# Altium PCB PCB.PcbDoc
Units mm, origin at the board's own origin, x right, y up, seen from the top; angles counter-clockwise.
Board outline 130.05 x 109.98 mm, 2 copper layers (Top Layer, Bottom Layer), stack 1.57 mm thick; 58 components, 41 nets, 197 pads, 319 vias.
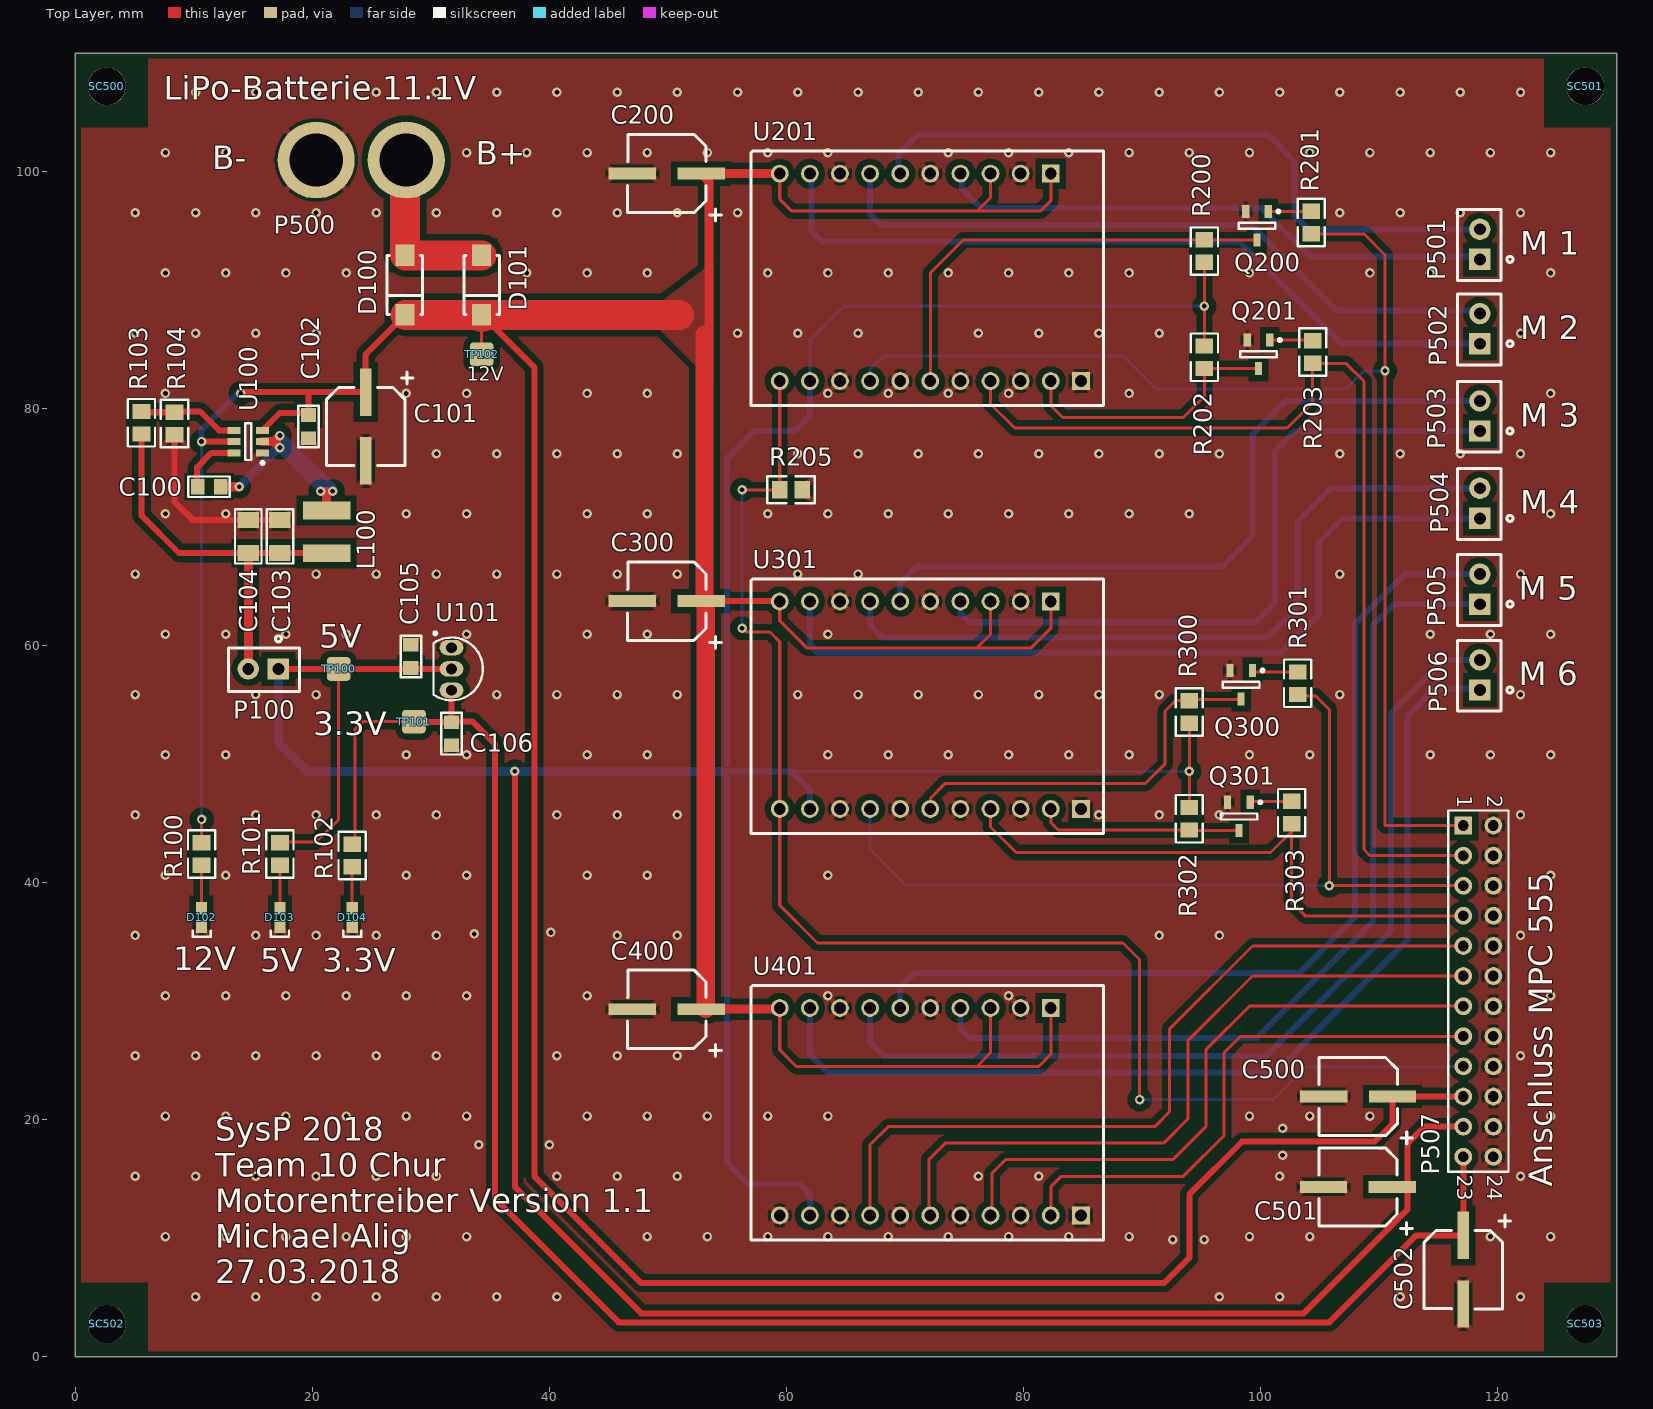
[diagram p0: Top Layer view]
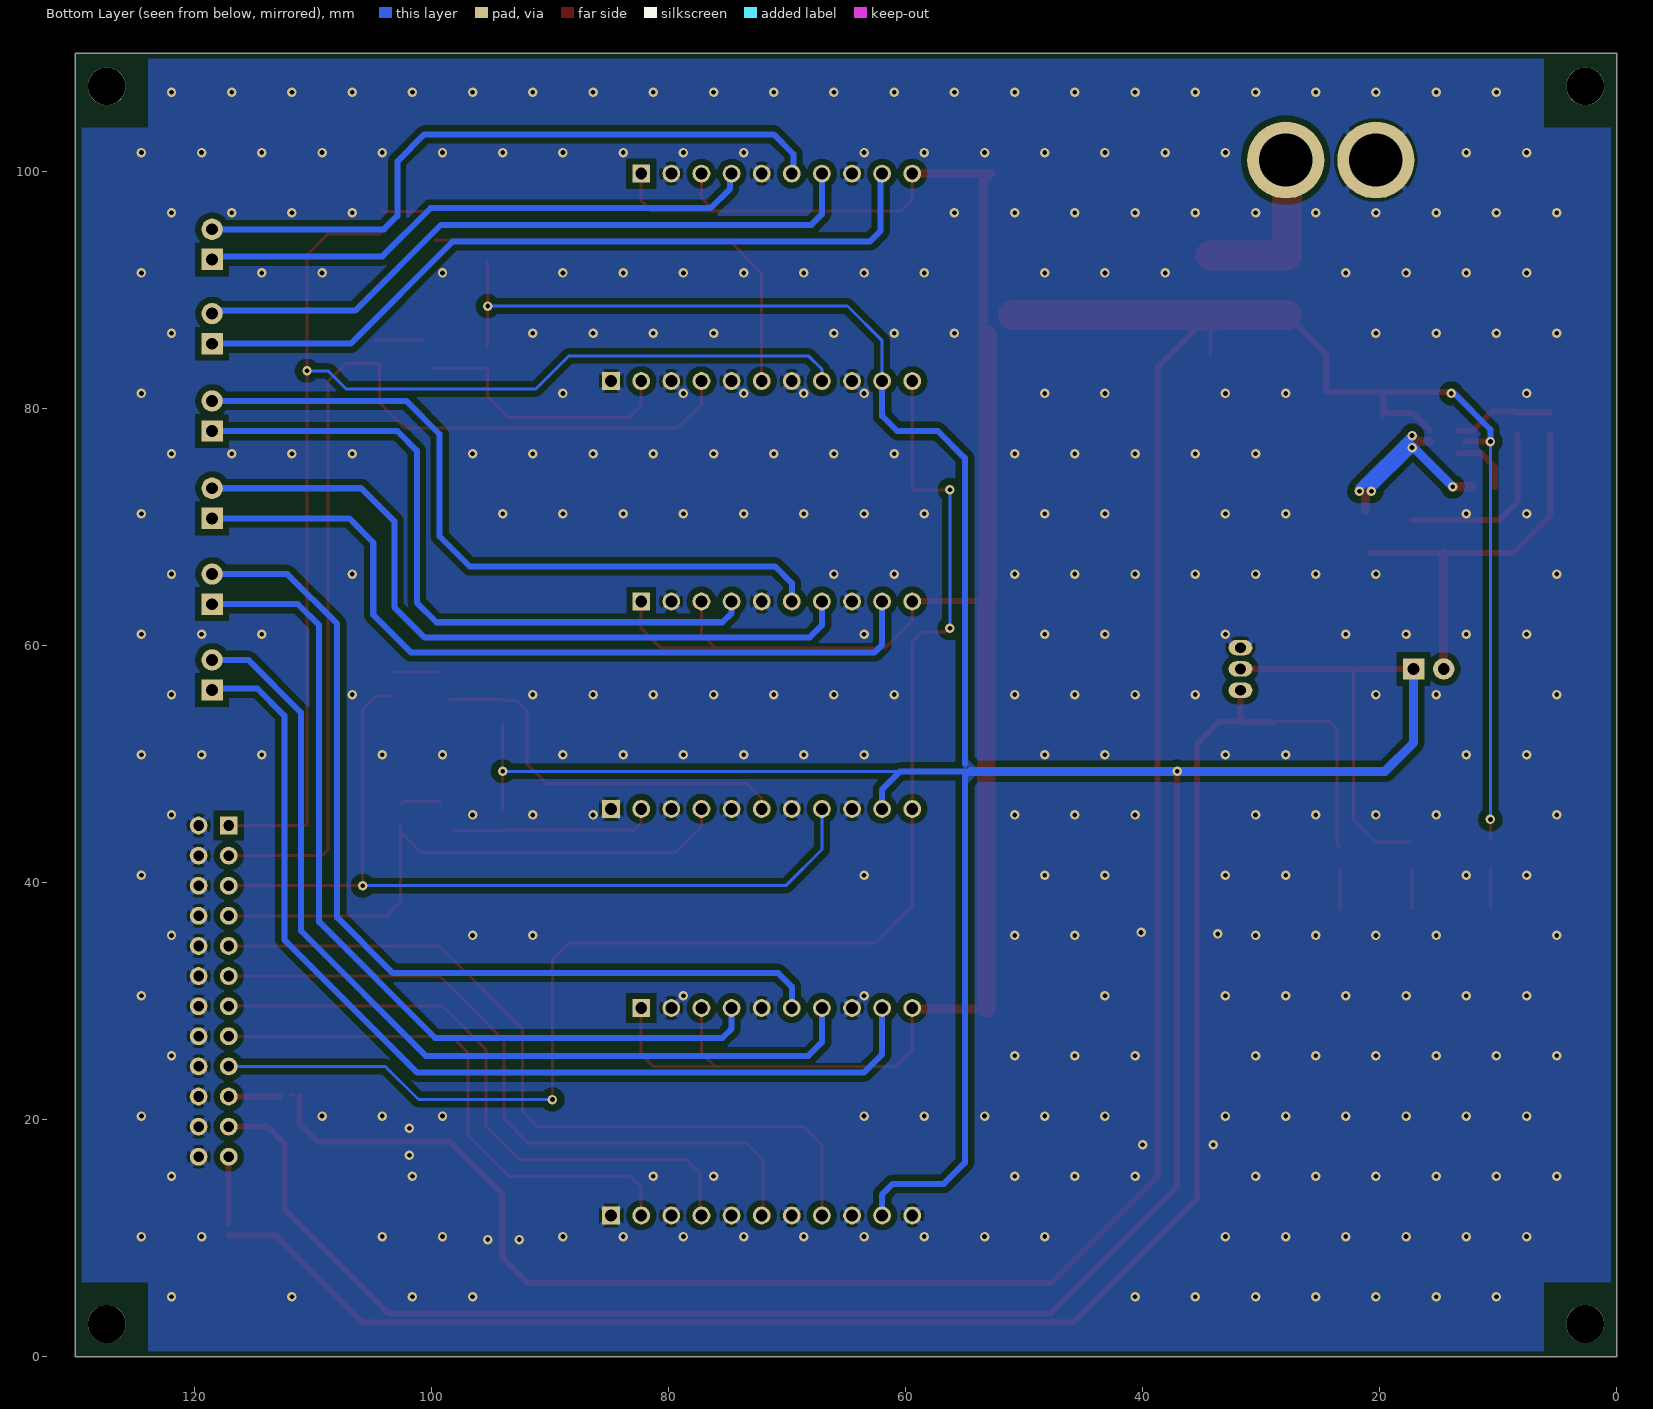
[diagram p1: Bottom Layer view, seen from below]
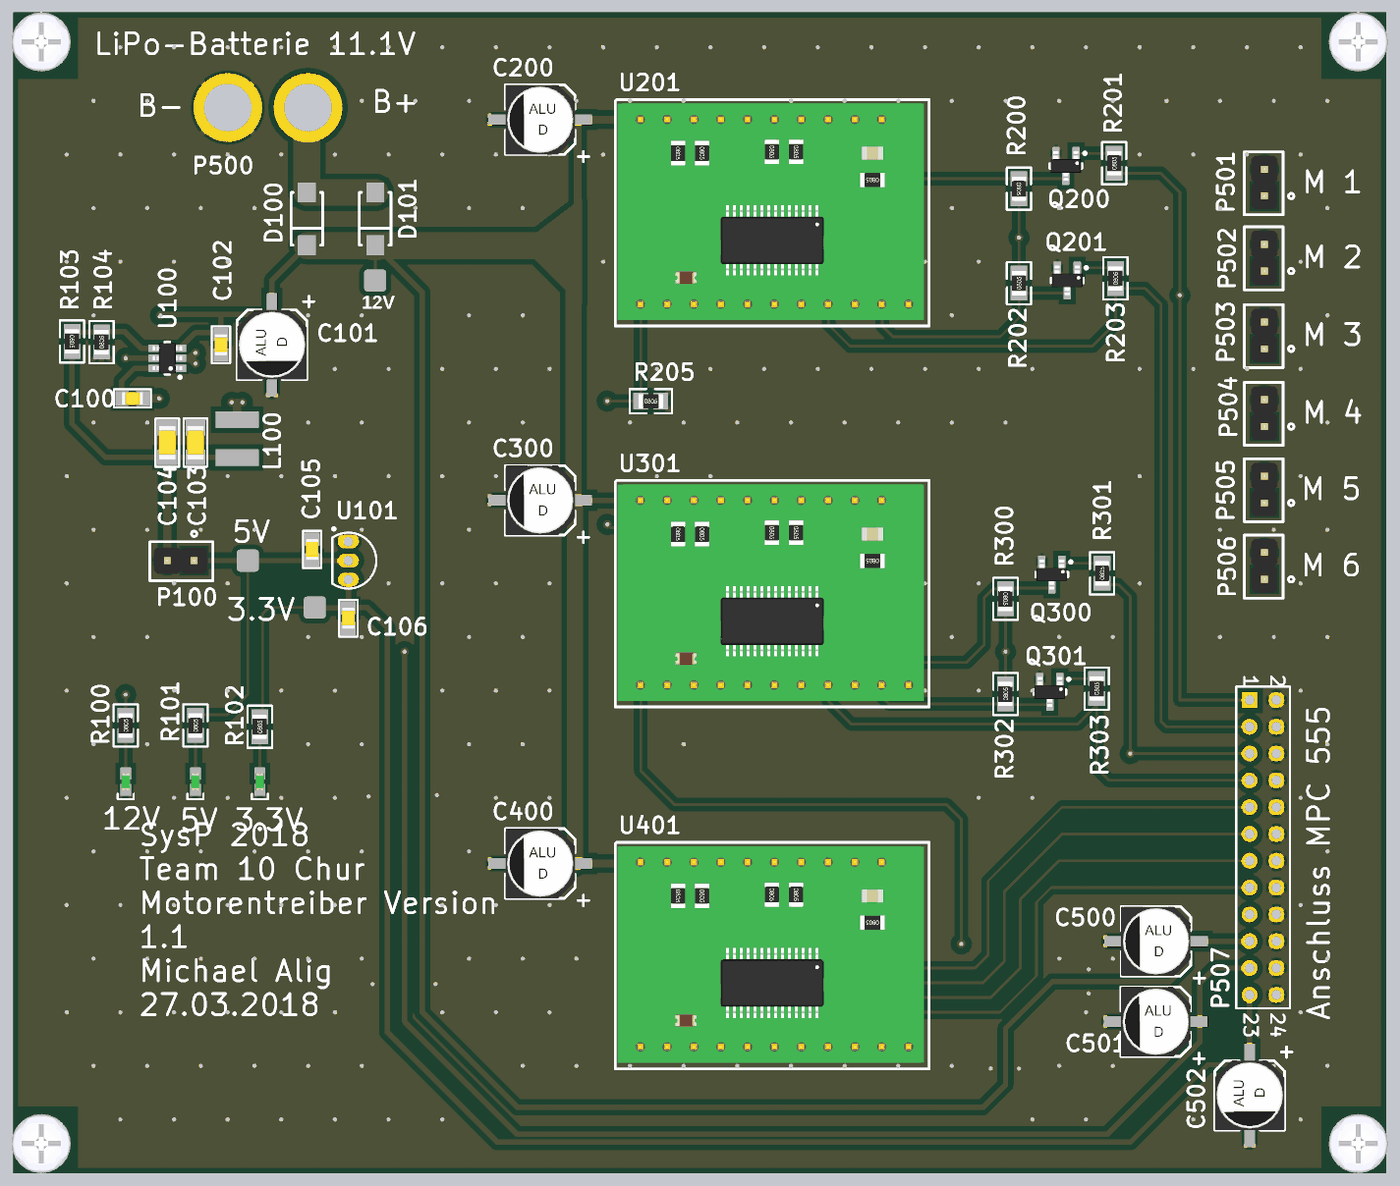
[diagram p2: 3D render of the assembled board from above, using the file's embedded part models]

## Layer stack, top to bottom
Top Solder: solder mask 0.0102, Solder Resist, Dk 3.5
Top Layer: signal copper 0.035
Dielectric1: core 1.5, FR-4, Dk 4.2
Bottom Layer: signal copper 0.035
Bottom Solder: solder mask 0.0102, Solder Resist, Dk 3.5

## Board outline
0,0 0,109.982 130.048,109.982 130.048,0

## Design rules (kind name [scope] priority, off if disabled: settings)
Clearance Polygon [InPolygon] p1: gap=0.508 ignorepadtopadclearanceinfootprint=FALSE except(0: Arc-Hole Track-Hole SMDPad-Hole THPad-Hole Via-Hole Fill-Hole Poly-Hole Region-Hole Text-Hole) // Polygon Clearance
Clearance [All] p2: gap=0.254 ignorepadtopadclearanceinfootprint=FALSE except(0: Arc-Hole Track-Hole SMDPad-Hole THPad-Hole Via-Hole Fill-Hole Poly-Hole Region-Hole Text-Hole)
FabricationTestPointUsage TestPointUsage [All] p1 off: valid=0 allowmultiple=FALSE
FabricationTestpoint Testpoint [All] p1 off: side=3 testpointundercomponent=TRUE minsize=1.016 maxsize=2.54 preferedsize=1.524 minholesize=0 maxholesize=1.016 preferedholesize=0.813 testpointgrid=0.025 allowsidetop=TRUE allowsidebottom=TRUE usegrid=TRUE gridtolerance=0
FanoutControl Fanout_BGA [IsBGA] p1 off: bgadir=Out bgaviamode=Centered fanoutstyle=Auto fanoutdirection=Alternating viagrid=0.025 // Fanout_BGA (Default Rule)
FanoutControl Fanout_LCC [IsLCC] p2 off: bgadir=Out bgaviamode=Centered fanoutstyle=Auto fanoutdirection=Alternating viagrid=0.025 // Fanout_LCC (Default Rule)
FanoutControl Fanout_SOIC [IsSOIC] p3 off: bgadir=Out bgaviamode=Centered fanoutstyle=Auto fanoutdirection=Alternating viagrid=0.025 // Fanout_SOIC (Default Rule)
FanoutControl Fanout_Small [(CompPinCount < 5)] p4 off: bgadir=Out bgaviamode=Centered fanoutstyle=Auto fanoutdirection=OutThenIn viagrid=0.025 // Fanout_Small (Default Rule)
FanoutControl Fanout_Default [All] p5 off: bgadir=Out bgaviamode=Centered fanoutstyle=Auto fanoutdirection=Alternating viagrid=0.025 // Fanout_Default (Default Rule)
Height [All] p1 off: minheight=0 maxheight=25.4 prefheight=12.7
HoleSize HoleType [IsPad And HasSquareHole] p1: absolutevalues=TRUE maxlimit=0 minlimit=0 maxpercent=80.000 minpercent=20.000 // Find Square Holes
HoleSize [All] p2: absolutevalues=TRUE maxlimit=5 minlimit=0.4 maxpercent=80.000 minpercent=20.000
LayerPairs [All] p1 off: enforce=TRUE
MinimumAnnularRing "Minimum Annular Ring" [All] p1: minimumring=0.2
PasteMaskExpansion [All] p1: expansion=0.05
PolygonConnect PolygonConnectVia [IsVia] p1: connectstyle=Direct reliefconductorwidth=0.254 reliefentries=4 polygonreliefangle="90 Angle" airgapwidth=0.254 // Direct Connect Via
PolygonConnect [All] p2: connectstyle=Relief reliefconductorwidth=0.508 reliefentries=4 polygonreliefangle="45 Angle" airgapwidth=0.254
RoutingCorners [All] p1 off: cornerstyle=45-Degree minsetback=2.54 maxsetback=2.54
RoutingLayers [All] p1 off: top layer_v5=TRUE bottom layer_v5=TRUE
RoutingPriority [All] p1 off: routingpriority=0
RoutingTopology [All] p1 off: topology=Shortest
RoutingVias [All] p1: holewidth=0.4 width=0.8 viastyle="Through Hole" minholewidth=0.3 minwidth=0.7 maxholewidth=2 maxwidth=3.4
SignalStimulus "#Version Information" [All] p1 off: kind=1 level=0 starttime=10.00n stoptime=60.00n periodtime=100.00n // Version 0-9 from 2010-11-01
SilkToSolderMaskClearance SilkscreenOverComponentPads [IsPad] p1: minsilkscreentomaskgap=0.254 clearancetoexposedcopper=TRUE
SolderMaskExpansion [All] p1: expansion=0.05
Width [All] p1: maxlimit=2.54 minlimit=0.254 preferedwidth=0.254 minimp=50.000000 maximp=50.000000 favimp=50.000000
14 further rules are at their usual default settings.

## Classes and differential pairs
component class Uebersicht: C500 C501 C502 P500 P501 P502 P503 P504 P505 P506 P507 P508 P509 P510 P511 SC500 SC501 SC502 SC503
component class "Spannungsversorgung: 12V, 5V, 3.3V": C100 C101 C102 C103 C104 C105 C106 C205 C206 D100 D101 D102 D103 D104 F100 L100 P100 R100 R101 R102 R103 R104 TP100 TP101 TP102 U100 U101
component class "Motor3: Hubmechanismus    Motor3: Ausfahrmechanismus": C300 Q300 Q301 R300 R301 R302 R303 U301
component class "Motor1: Fortbewegung    Motor2: Reserve": C200 Q200 Q201 R200 R201 R202 R203 R205 U201
component class "Motor5: Vibbration    Motor6: Drehmechanismus": C400 U401

## Components (designator, comment, footprint, x,y, rotation, side; value= is the part's Value field where it differs from the comment)
C100 "100nF" CAPC0805 11.303,73.406 r0 top value=100n
C101 "AVE476M16D16T-F" "CDE_CAP AVE CODE D_H" 24.511,78.486 r180 top value=10uF
C102 "100nF" CAPC0805 19.685,78.486 r270 top value=100n
C103 "22uF" CAPC1206 17.272,69.215 r270 top value=22u
C104 "22uF" CAPC1206 14.605,69.215 r90 top value=22u
C105 "1uF" CAPC0805 28.321,59.096 r90 top value=100n
C106 "1uF" CAPC0805 31.75,52.578 r270 top value=100n
C200 "AVE476M16D16T-F" "CDE_CAP AVE CODE D_H" 49.911,99.822 r90 top value=10uF
C300 "AVE476M16D16T-F" "CDE_CAP AVE CODE D_H" 49.911,63.754 r90 top value=10uF
C400 "AVE476M16D16T-F" "CDE_CAP AVE CODE D_H" 49.911,29.337 r90 top value=10uF
C500 "AVE476M16D16T-F" "CDE_CAP AVE CODE D_H" 108.225,21.971 r90 top value=10uF
C501 "AVE476M16D16T-F" "CDE_CAP AVE CODE D_H" 108.204,14.351 r90 top value=10uF
C502 "AVE476M16D16T-F" "CDE_CAP AVE CODE D_H" 117.094,7.366 r180 top value=10uF
D100 "SK34SMA" DIOTEC_DO-214AC_1K2A_2_H 27.813,90.424 r270 top
D101 "SK34SMA" DIOTEC_DO-214AC_1K2A_2_H 34.29,90.424 r270 top
D102 "LTST-C190GKT" "LED 0603 green" 10.668,37.084 r90 top
D103 "LTST-C190GKT" "LED 0603 green" 17.272,37.084 r90 top
D104 "LTST-C190GKT" "LED 0603 green" 23.368,37.084 r90 top
L100 "NRS5020T4R7MMGJ" NRS5024T4R7MMGJV 21.209,69.596 r270 top
P100 "Stiftleiste 2 Pol" "2Pin Header 2.54mm" 17.145,58.039 r180 top
P500 "Stecker XT-60" "Batteriestecker XT-60" 24.13,100.965 r0 top
P501 "Stiftleiste 2 Pol" "2Pin Header 2.54mm" 118.491,92.583 r90 top
P502 "Stiftleiste 2 Pol" "2Pin Header 2.54mm" 118.491,85.471 r90 top
P503 "Stiftleiste 2 Pol" "2Pin Header 2.54mm" 118.491,78.105 r90 top
P504 "Stiftleiste 2 Pol" "2Pin Header 2.54mm" 118.491,70.739 r90 top
P505 "Stiftleiste 2 Pol" "2Pin Header 2.54mm" 118.491,63.5 r90 top
P506 "Stiftleiste 2 Pol" "2Pin Header 2.54mm" 118.491,56.261 r90 top
P507 "Stiftleiste 24Pol (12X2)" HDR2X12 117.094,44.831 r270 top
Q200 "Si2302CDS" SOT23-3 99.695,95.434 r270 top
Q201 "Si2302CDS" SOT23-3 99.822,84.582 r270 top
Q300 "Si2302CDS" SOT23-3 98.359,56.712 r270 top
Q301 "Si2302CDS" SOT23-3 98.171,45.593 r270 top
R100 "Generic" GEN_R0805_H 10.668,42.418 r90 top value=18k
R101 "Generic" GEN_R0805_H 17.272,42.418 r90 top value=5.6k
R102 "Generic" GEN_R0805_H 23.368,42.291 r90 top value=4.7k
R103 "Generic" GEN_R0805_H 5.588,78.806 r270 top value=56k
R104 "Generic" GEN_R0805_H 8.382,78.74 r90 top value=10k
R200 "Generic" GEN_R0805_H 95.25,93.279 r270 top value=1k
R201 "Generic" GEN_R0805_H 104.267,95.692 r90 top value=10
R202 "Generic" GEN_R0805_H 95.25,84.328 r90 top value=1k
R203 "Generic" GEN_R0805_H 104.394,84.77 r90 top value=10
R205 "Generic" GEN_R0805_H 60.391,73.152 r0 top value=10k
R300 "Generic" GEN_R0805_H 93.98,54.417 r270 top value=1k
R301 "Generic" GEN_R0805_H 103.124,56.83 r90 top value=10
R302 "Generic" GEN_R0805_H 93.98,45.4 r90 top value=1k
R303 "Generic" GEN_R0805_H 102.616,45.913 r90 top value=10
SC500 "Screw M3x10mm with Distancebolt 15mm" Screw_M3x10_Dist_15mm 2.667,107.188 r0 top
SC501 "Screw M3x10mm with Distancebolt 15mm" Screw_M3x10_Dist_15mm 127.381,107.188 r0 top
SC502 "Screw M3x10mm with Distancebolt 15mm" Screw_M3x10_Dist_15mm 2.667,2.794 r0 top
SC503 "Screw M3x10mm with Distancebolt 15mm" Screw_M3x10_Dist_15mm 127.381,2.794 r0 top
TP100 "Testpoint xSmall" TP_SMD_xsmall 22.225,58.039 r0 top
TP101 "Testpoint xSmall" TP_SMD_xsmall 28.575,53.594 r0 top
TP102 "Testpoint xSmall" TP_SMD_xsmall 34.29,84.582 r180 top
U100 "TPS562209" SOT23-6 14.605,77.216 r180 top
U101 "LP38691DT-3.3" TO-92-TO3 31.75,58.039 r180 top
U201 "DRV8841Board" DRV8841_Board 82.296,99.822 r270 top
U301 "DRV8841Board" DRV8841_Board 82.296,63.728 r270 top
U401 "DRV8841Board" DRV8841_Board 82.296,29.438 r270 top

## Footprints (in the part's own frame and the unit in brackets; to place one, negate y for a bottom-side part, rotate by r counter-clockwise, add the part's x,y. Pads: shape width x height; smd on the part's side, far side on the other; paste and mask are expansions set on the pad)
"2Pin Header 2.54mm" [mm]
  rect 1.8x1.8 hole 1: 1(0,0)
  round 1.8 hole 1: 2(2.54,0)
  silkscreen extent -1.78,-2.79 4.19,1.91, body extent -1.27,-1.24 3.81,1.25, height 8.54
"Batteriestecker XT-60" [mm] "XT-60"
  round 6.5 hole 4.5: 1(-3.8,0) 2(3.8,0)
  body extent -8,-4 8,4, height 16
CAPC0805 [mm]
  rect 1.149x1.3 smd: 1(-0.975,0) 2(0.975,0)
  silkscreen extent -1.75,-0.86 1.75,0.86, body extent -1,-0.6 1,0.6, height 1.2
CAPC1206 [mm]
  rect 1.35x1.8 smd: 1(-1.4,0) 2(1.4,0)
  silkscreen extent -2.29,-1.12 2.29,1.12, body extent -1.6,-0.8 1.6,0.8, height 1.8
"CDE_CAP AVE CODE D_H" [mm]
  rect 1x4 smd paste-0.002 mask+0.07: 1(0,-2.9) 2(0,2.9)
  silkscreen extent -4,-4.6 3.29,3.3, body extent -3.31,-3.5 3.29,3.5
DIOTEC_DO-214AC_1K2A_2_H [mm]
  rect 1.8x1.6 smd: 1(2.5,0) 2(-2.5,0)
  silkscreen extent -2.5,-1.5 2.5,1.5
DRV8841_Board [mm]
  rect 1.5x1.5 hole 1: 11(0,0) 21(17.5,2.54)
  round 1.5 hole 1: 12(0,-2.54) 13(0,-5.08) 14(0,-7.62) 15(0,-10.16) 16(0,-12.7) 17(0,-15.24) 18(0,-17.78) 19(0,-20.32) 22(17.5,0) 23(17.5,-2.54) 24(17.5,-5.08) 25(17.5,-7.62) 26(17.5,-10.16) 27(17.5,-12.7) 28(17.5,-15.24) 29(17.5,-17.78) 110(0,-22.86) 210(17.5,-20.32) 211(17.5,-22.86)
  silkscreen extent -1.91,-25.27 19.56,4.45, body extent -1.52,-25.04 18.98,3.96, height 7.94
GEN_R0805_H [mm]
  rect 1.3x1.5 smd: 1(-0.95,0) 2(0.95,0)
  silkscreen extent -2,-1.15 2,1.15, body extent -1.15,-0.67 1.15,0.68, height 0.76
HDR2X12 [mm] "Connector; Header; 12x2 Position"
  rect 1.5x1.5 hole 0.9: 1(0,0)
  round 1.5 hole 0.9: 2(0,2.54) 3(2.54,0) 4(2.54,2.54) 5(5.08,0) 6(5.08,2.54) 7(7.62,0) 8(7.62,2.54) 9(10.16,0) 10(10.16,2.54) 11(12.7,0) 12(12.7,2.54) 13(15.24,0) 14(15.24,2.54) 15(17.78,0) 16(17.78,2.54) 17(20.32,0) 18(20.32,2.54) 19(22.86,0) 20(22.86,2.54) 21(25.4,0) 22(25.4,2.54) 23(27.94,0) 24(27.94,2.54)
  silkscreen extent -1.27,-1.27 29.21,3.81
"LED 0603 green" [mm]
  rect 1.05x0.95 smd: 1(-0.775,0) 2(0.775,0)
  silkscreen extent -1.65,-0.76 -1.14,0.76, body extent -0.81,-0.4 0.81,0.4, height 0.6
NRS5024T4R7MMGJV [mm] "NRS5024T4R7MMGJV"
  rect 1.5x4 smd: 1(-1.8,0) 2(1.8,0)
  body extent -1.8,-2 1.8,2, height 2.4
Screw_M3x10_Dist_15mm [mm]
  round 3.2 hole 3.2: 0(0,0)
  Multi-Layer pour cut-out: -3.5,3.5 3.5,3.5 3.5,-3.5 -3.5,-3.5
  body extent -2.8,-2.89 2.8,2.89, height 2.38
SOT23-3 [mm]
  rect 1.1x0.6 smd: 1(-1.2,0.95) 2(-1.2,-0.95) 3(1.2,0)
  silkscreen extent -1.32,-1.55 0.25,1.93, body extent -1.4,-1.45 1.4,1.45, height 1.3
SOT23-6 [mm]
  rect 1.1x0.6 smd: 1(-1.2,0.95) 2(-1.2,0) 3(-1.2,-0.95) 4(1.2,-0.95) 5(1.2,0) 6(1.2,0.95)
  silkscreen extent -1.33,-1.55 0.25,1.92, body extent -1.4,-1.45 1.4,1.45, height 1.45
TO-92-TO3 [mm] "TO, Flat Index; 3 In-Line, Axial Leads; Body Dia. 4.8mm; Leads 0.56 x 0.53 mm (max)"
  oval 2x1.3 hole 0.9: 1(0,-1.8) 2(0,0) 3(0,1.8)
  silkscreen extent -2.65,-3.13 1.52,2.65, body extent -2.65,-2.66 1.52,2.66, height 5.33
TP_SMD_xsmall [mm]
  rrect30% 2x2 smd: 1(0,0)

## Part data
C100 C102 C105 C106: library part "C Bipolar 0805", "X7R MLCC 0805 (2012 Metric)", Case-EIA=0805, Case-Metric=2012, Rated Voltage=50V, Temperature Characteristics EIA=X7R, Temperature Range EIA=-55C/+125C, Tolerance=10%
C101 C200 C300 C400 C500 C501 C502: library part "CDE_AVE476M16D16T-F_AVE CODE D", "Aluminum Electrolytic Capacitors for Filtering and Bypass, 47uF, 16V", Distributor PartNr=598-AVE476M16D16T-F, Manufacturer="Cornell Dubilier", ValueAddon="16V ±20 %", #Class=PASSIVE, #ClassSub=CAPACITOR, ComponentLink1Description="Manufacturer Link", ComponentLink2Description=Datasheet, ComponentLink2URL=http://www.cde.com/catalogs/AVE.pdf, ComponentLink3Description="Packaging Specification", Distributor=Mouser, Manufacturer PartNr=AVE476M16D16T-F, Published=20121220, Publisher="Stefan Ursella, M.Eng", RefFootprint="CDE_CAP AVE CODE D", RefSchema="CDE_AVE476M16D16T-F_AVE CODE D"
C103 C104: library part "C Bipolar 1206", "X7R MLCC 1206 (3016 Metric)", Case-EIA=1206, Case-Metric=3216, Rated Voltage=10V, Temperature Characteristics EIA=X7R, Temperature Range EIA=-55C/+125C, Tolerance=10%
D100 D101: library part DIOTEC_SK34SMA_DO-214AC, Distributor PartNr=600727, Manufacturer="Diotec Semiconductor", #Class=DIODE, #ClassSub=SCHOTTKY, ComponentLink1Description="Manufacturer Link", ComponentLink1URL=http://diotec.com/en/products/all-products/productlist.html?aid=SK34SMA, ComponentLink2Description=Datasheet, ComponentLink2URL=http://diotec.com/tl_files/diotec/files/pdf/datasheets/sk32sma.pdf, ComponentLink3Description="Packaging Specification", ComponentLink3URL=http://diotec.com/en/products/all-products/productlist.html?aid=SK34SMA, Distributor=Distrelec, Manufacturer PartNr=SK34SMA, Published=20121217, Publisher="Stefan Ursella, M.Eng", RefFootprint=DIOTEC_DO-214AC_1K2A_2_H, RefSchema=DIOTEC_SK34SMA_DO-214AC, Status=nLager
D102 D103 D104: library part LED, "LED SMD 0603 green 6mcd", Color=green, Forward Current=30mA, Forward Voltage=2.1V, ComponentLink1Description="Datasheet LTST-C190GKT", ComponentLink1URL=V:\Diodes\Lite-On-LTST-C190GKT.pdf, Spectrum=565nm
L100: "Tayo Yuden NRS5020T4R7MMGJ 4u7 2A"
P100: library part "2 Pin Connector"
P500: library part "Batteriestecker XT-60"
P501 P502 P503 P504 P505 P506: library part "2 Pin Connector", "2 Pin Header 2.54mm"
P507: library part "Header 12X2", "Header, 12-Pin, Dual row", LatestRevisionDate=17-Jul-2002, LatestRevisionNote="Re-released for DXP Platform.", Publisher="Altium Limited"
Q200 Q201 Q300 Q301: library part "Depletion Mode MOSFET", "N-Channel 20V (D-S) MOSFET", ComponentLink1Description="Datasheet Si2302CDS", ComponentLink1URL=V:\MosFets\si2302cds.pdf, ID=2.9A, RDSON=57mR, VDSS=20V
R100 R101 R102 R103 R104 R200 R201 R202 R203 R205 R300 R301 R302 R303: library part GEN_R_2, "generic resistor", Distributor PartNr=tbd, Manufacturer=Tbd, #Class=PASSIVE, #ClassSub=RESISTOR, ComponentLink1Description="Manufacturer Link", ComponentLink2Description=Datasheet, ComponentLink3Description="Packaging Specification", Distributor=tbd, Manufacturer PartNr=tbd, Published=8-Jun-2000, Publisher="Altium Limited", RefFootprint=GEN_R0805_H, RefSchema=GEN_R_2
SC500 SC501 SC502 SC503: library part "Screw M3 10mm with Distancebolt 15mm"
TP100 TP101 TP102: library part "Testpoint small", Type="Standard (No BOM)"
U100: "3-A Synchronous Step-Down Voltage Regulator", Manufactor="Texas Instruments", ComponentLink1Description="Datasheet TPS56x209", ComponentLink1URL=V:\Power_Management_ICs\PWM_Cont\TPS56x209.pdf, Order Nr.=TPS562209DDCR
U101: library part MCP1700-1202E/TO, "Low Quiescent Current LDO, 3-Pin TO-92, Extended TemperatureBAG", Supplier Part Number 1=MCP1700-1202E/TO-ND, ComponentLink1Description=Datasheet, ComponentLink1URL=http://ww1.microchip.com/downloads/en/DeviceDoc/21826b.pdf, ComponentLink2Description="Packaging Specification", ComponentLink2URL=http://www.microchip.com/stellent/groups/techpub_sg/documents/packagingspec/en012702.pdf, ComponentLink3Description="Microchip.com Home", ComponentLink3URL=http://www.microchip.com/, DatasheetVersion="revB, Feb-2007", PackageDescription="3-Lead Plastic Transistor Outline (TO) [TO-92]", PackageReference=TO-92-TO3, PackageVersion="revBB, Aug-2009", Published=29-Jan-2009, Publisher="Altium Limited", Supplier 1=Digi-Key
U201 U301 U401: library part DRV8841_Board

## Via types
v1: diameter 0.8, hole 0.4, Top Layer to Bottom Layer, tented both sides, 319 vias

## Nets (pads, with @x,y where several pads share a name; then routed paths per layer and width w, separated by ;. In a path a pad name is that pad's centre, name@x,y a point inside that pad or via, vN(x,y) a via of type N, cw(c..) or ccw(c..) an arc to the next point about the centre after c; other vN are vias at no path point)
3.3V: C106.1 C502.1 P507.23 R102.2 TP101.1 U101.3 | length 158.6
  Top Layer w0.254: R102.2@23.368,43.053 23.411,43.063 23.622,43.114 23.622,52.959 24.257,53.594 TP101.1 28.829,53.594 TP101.1@28.87,53.553
  Top Layer w0.508: TP101.1@28.87,53.553 C106.1 ; U101.3 31.75,53.594 33.528,53.594 35.433,51.689 35.433,13.335 45.847,2.921 105.791,2.921 113.136,10.266 C502.1 ; C502.1@117.094,11.303 P507.23
5V: C105.1 C501.1 P100.1 P507.21 R101.2 R200.2 R202.2 R300.2 R302.2 TP100.1 U101.2 U201.210 U301.210 U401.210 | length 380.7
  Top Layer w0.254: R101.2@17.399,43.434 20.32,43.434 22.225,45.339 TP100.1 ; C105.1@28.321,58.166 C105.1@28.448,58.039 ; R302.2@93.98,46.228 R302.2 v1(93.98,49.403) R300.2 ; R202.2@95.25,85.217 R202.2 v1(95.25,88.646) R200.2
  Top Layer w0.508: P100.1 TP100.1@21.971,58.039 ; TP100.1 28.448,58.039 U101.2@31.242,58.039 ; v1(37.084,49.403) 37.084,14.351 47.752,3.683 103.632,3.683 112.395,12.446 112.395,18.034 113.792,19.431 P507.21
  Bottom Layer w0.254: 60.452,49.403 v1(93.98,49.403) ; U201.210 61.976,85.725 64.897,88.646 v1@95.123,88.646
  Bottom Layer w0.508: 54.991,50.038 54.991,75.819 57.277,78.105 60.706,78.105 61.976,79.375 U201.210@61.976,82.296 ; U401.210 61.976,13.716 61.087,14.605 56.769,14.605 54.991,16.383 54.991,49.403 60.452,49.403 61.976,47.879 U301.210@61.976,46.609
  Bottom Layer w0.762: P100.1 17.145,51.816 19.558,49.403 v1(37.084,49.403) 54.483,49.403
12V: C101.1 C102.1 C200.1 C300.1 C400.1 C500.1 D100.1 D101.1 P507.19 R100.2 TP102.1 U100.3 U100.5 U201.11 U201.13 U201.110 U301.11 U301.13 U301.110 U401.11 U401.13 U401.110 | length 449.3
  Top Layer w0.254: R100.2@10.668,43.688 v1(10.668,45.339) ; D100.1@27.833,87.904 D100.1@27.94,88.011 ; TP102.1 D101.1@34.29,87.376 ; D101.1 D101.1@34.33,87.884 ; C400.1 53.192,29.337 C400.1@53.213,29.337 ; 53.192,63.246 C300.1@53.192,63.754 ; U401.110 U401.110@59.436,29.337 ; U301.110 59.436,62.103 61.722,59.817 76.073,59.817 ; U201.110 59.436,97.663 60.452,96.647 76.073,96.647 ; U401.110@59.563,29.464 U401.110@59.436,29.337 ; U401.13 77.216,25.654 76.073,24.511 ; U301.13@77.216,63.627 77.216,60.96 76.073,59.817 ; U201.13@77.216,99.568 77.216,97.79 76.073,96.647 ; U401.11@82.296,29.464 U401.11 82.296,25.527 81.28,24.511 76.073,24.511 ; U301.11 82.296,61.468 80.645,59.817 76.073,59.817 ; U201.11@82.296,99.695 82.296,97.536 81.407,96.647 76.073,96.647 ; C500.1@111.506,22.098 C500.1@111.887,22.098 ; C500.1@112.649,22.098 C500.1@112.776,21.971 ; U401.110@59.436,29.337 59.436,25.908 60.833,24.511 76.073,24.511
  Top Layer w0.508: v1@10.922,77.216 12.77,77.216 ; v1@13.991,81.386 C101.1 24.511,84.582 D100.1@27.833,87.904 ; U100.3 17.268,79.629 C102.1@19.685,79.629 ; C102.1 C102.1@19.685,79.629 ; 19.685,81.28 C102.1@19.685,79.629 ; D101.1@34.457,87.757 38.735,83.479 38.735,15.24 47.752,6.223 91.821,6.223 93.98,8.382 93.98,13.716 98.425,18.161 109.601,18.161 111.125,19.685 C500.1 ; C300.1@53.192,63.754 U301.110@59.436,63.754 ; C500.1@112.776,21.971 P507.19
  Top Layer w0.762: D100.1@27.833,87.904 D100.1@27.853,87.884 ; C200.1 53.467,99.166 53.467,86.614 53.086,86.233 ; C300.1@53.086,63.86 C300.1@53.192,63.754 ; C200.1@53.192,99.822 U201.110 ; C400.1@53.213,29.337 U401.110@59.436,29.337
  Top Layer w1.524: C300.1@53.086,63.86 53.086,86.233 ; C400.1@53.192,29.337 53.192,63.246
  Top Layer w2.54: D100.1@27.853,87.884 D101.1@34.163,87.884 ; D101.1@34.163,87.757 D101.1@34.457,87.757 ; D101.1@34.33,87.884 50.927,87.884
  Bottom Layer w0.254: v1(10.668,45.339) v1@10.668,77.089 ; v1@10.668,77.343 v1@10.922,77.089 ; v1@13.716,81.28 v1(13.97,81.28) ; U401.13 U401.13@77.216,29.464
  Bottom Layer w0.508: v1@10.668,77.343 10.668,78.232 v1@13.716,81.28
  other v1: 10.668,77.216
GND: C101.2 C102.2 C103.1 C104.2 C105.2 C106.2 C200.2 C300.2 C400.2 C500.2 C501.2 C502.2 D102.1 D103.1 D104.1 P500.1 P507.2 P507.4 P507.6 P507.8 P507.10 P507.12 P507.14 P507.16 P507.18 P507.20 P507.22 P507.24 Q200.2 Q201.2 Q300.2 Q301.2 R104.1 R205.2 U100.1 U101.1 U201.12 U201.15 U201.18 U201.21 U201.23 U201.25 U201.27 U201.29 U301.12 U301.15 U301.18 U301.21 U301.23 U301.25 U301.27 U301.29 U401.12 U401.15 U401.18 U401.21 U401.23 U401.25 U401.27 U401.29 U401.211 | length 15.2
  Top Layer w0.254: C103.1@17.269,70.615 C103.1@17.272,70.612
  Top Layer w0.508: R104.1 8.382,72.136 9.906,70.612 C104.2@14.605,70.612 ; C104.2 C103.1@17.269,70.615
  other v1: 10.16,5.08 15.24,5.08 20.32,5.08 25.4,5.08 30.48,5.08 35.56,5.08 40.64,5.08 96.52,5.08 101.6,5.08 111.76,5.08 121.92,5.08 92.583,9.906 95.25,9.906 7.62,10.16 12.7,10.16 17.78,10.16 22.86,10.16 27.94,10.16 33.02,10.16 48.26,10.16 53.34,10.16 58.42,10.16 63.5,10.16 68.58,10.16 73.66,10.16 78.74,10.16 83.82,10.16 88.9,10.16 99.06,10.16 104.14,10.16 119.38,10.16 124.46,10.16 5.08,15.24 10.16,15.24 15.24,15.24 20.32,15.24 25.4,15.24 30.48,15.24 40.64,15.24 45.72,15.24 50.8,15.24 76.2,15.24 81.28,15.24 101.6,15.24 121.92,15.24 101.854,17.018 34.036,17.907 40.005,17.907 101.854,19.304 7.62,20.32 12.7,20.32 17.78,20.32 22.86,20.32 27.94,20.32 33.02,20.32 43.18,20.32 48.26,20.32 53.34,20.32 58.42,20.32 63.5,20.32 99.06,20.32 104.14,20.32 109.22,20.32 124.46,20.32 5.08,25.4 10.16,25.4 15.24,25.4 20.32,25.4 25.4,25.4 30.48,25.4 40.64,25.4 45.72,25.4 50.8,25.4 121.92,25.4 7.62,30.48 12.7,30.48 17.78,30.48 22.86,30.48 27.94,30.48 33.02,30.48 43.18,30.48 63.5,30.48 78.74,30.48 124.46,30.48 5.08,35.56 15.24,35.56 20.32,35.56 25.4,35.56 30.48,35.56 45.72,35.56 50.8,35.56 91.44,35.56 96.52,35.56 121.92,35.56 33.655,35.687 40.132,35.814 7.62,40.64 12.7,40.64 27.94,40.64 33.02,40.64 43.18,40.64 48.26,40.64 63.5,40.64 124.46,40.64 5.08,45.72 15.24,45.72 20.32,45.72 25.4,45.72 30.48,45.72 40.64,45.72 45.72,45.72 50.8,45.72 86.36,45.72 91.44,45.72 96.52,45.72 121.92,45.72 7.62,50.8 12.7,50.8 27.94,50.8 33.02,50.8 43.18,50.8 48.26,50.8 63.5,50.8 68.58,50.8 73.66,50.8 78.74,50.8 83.82,50.8 88.9,50.8 99.06,50.8 104.14,50.8 114.3,50.8 119.38,50.8 124.46,50.8 5.08,55.88 15.24,55.88 20.32,55.88 35.56,55.88 40.64,55.88 45.72,55.88 50.8,55.88 60.96,55.88 66.04,55.88 71.12,55.88 76.2,55.88 81.28,55.88 86.36,55.88 91.44,55.88 106.68,55.88 121.92,55.88 7.62,60.96 12.7,60.96 17.78,60.96 22.86,60.96 33.02,60.96 43.18,60.96 48.26,60.96 63.5,60.96 114.3,60.96 119.38,60.96 124.46,60.96 5.08,66.04 20.32,66.04 25.4,66.04 30.48,66.04 35.56,66.04 40.64,66.04 45.72,66.04 50.8,66.04 60.96,66.04 66.04,66.04 106.68,66.04 121.92,66.04 7.62,71.12 12.7,71.12 27.94,71.12 33.02,71.12 43.18,71.12 48.26,71.12 58.42,71.12 63.5,71.12 68.58,71.12 73.66,71.12 78.74,71.12 83.82,71.12 88.9,71.12 93.98,71.12 124.46,71.12 30.48,76.2 35.56,76.2 40.64,76.2 45.72,76.2 50.8,76.2 60.96,76.2 66.04,76.2 71.12,76.2 76.2,76.2 81.28,76.2 86.36,76.2 91.44,76.2 96.52,76.2 106.68,76.2 111.76,76.2 116.84,76.2 121.92,76.2 7.62,81.28 27.94,81.28 33.02,81.28 43.18,81.28 48.26,81.28 63.5,81.28 68.58,81.28 73.66,81.28 78.74,81.28 88.9,81.28 124.46,81.28 5.08,86.36 10.16,86.36 15.24,86.36 20.32,86.36 55.88,86.36 60.96,86.36 66.04,86.36 76.2,86.36 81.28,86.36 86.36,86.36 91.44,86.36 121.92,86.36 7.62,91.44 12.7,91.44 17.78,91.44 22.86,91.44 38.1,91.44 43.18,91.44 48.26,91.44 58.42,91.44 63.5,91.44 68.58,91.44 73.66,91.44 78.74,91.44 83.82,91.44 88.9,91.44 99.06,91.44 109.22,91.44 114.3,91.44 124.46,91.44 5.08,96.52 10.16,96.52 15.24,96.52 20.32,96.52 25.4,96.52 30.48,96.52 35.56,96.52 40.64,96.52 45.72,96.52 50.8,96.52 55.88,96.52 106.68,96.52 111.76,96.52 116.84,96.52 121.92,96.52 7.62,101.6 12.7,101.6 33.02,101.6 38.1,101.6 43.18,101.6 48.26,101.6 53.34,101.6 58.42,101.6 63.5,101.6 73.66,101.6 78.74,101.6 83.82,101.6 88.9,101.6 93.98,101.6 99.06,101.6 104.14,101.6 109.22,101.6 114.3,101.6 119.38,101.6 124.46,101.6 10.16,106.68 15.24,106.68 20.32,106.68 25.4,106.68 30.48,106.68 35.56,106.68 40.64,106.68 45.72,106.68 50.8,106.68 55.88,106.68 60.96,106.68 66.04,106.68 71.12,106.68 76.2,106.68 81.28,106.68 86.36,106.68 91.44,106.68 96.52,106.68 101.6,106.68 106.68,106.68 111.76,106.68 116.84,106.68 121.92,106.68
NetC100_1: C100.1 U100.6 | length 5.3
  Top Layer w0.508: C100.1@10.287,73.406 10.287,75.057 11.496,76.266 U100.6
NetC100_2: C100.2 L100.1 U100.2 | length 21.4
  Top Layer w0.762: C100.2 v1(13.843,73.406) ; U100.2 16.764,77.216 ; v1@17.018,76.962 16.764,77.216 ; v1@17.018,77.47 16.764,77.216 ; L100.1 21.209,73.025
  Bottom Layer w0.254: v1(20.701,73.025) v1@20.701,73.279 ; v1(21.717,73.025) v1@21.717,73.279
  Bottom Layer w0.762: v1(13.843,73.406) v1@17.272,76.835 ; v1(17.272,76.708) v1@20.701,73.279 ; v1(17.272,77.724) v1@21.717,73.279
NetC103_2: C103.2 C104.1 L100.2 P100.2 R103.2 | length 32.6
  Top Layer w0.254: P100.2@14.478,58.42 P100.2@14.605,58.547 ; C103.2@17.269,67.815 C103.2@17.272,67.818 ; L100.2@20.825,67.815 L100.2@20.828,67.818
  Top Layer w0.508: R103.2 5.588,70.993 8.763,67.818 C104.1@14.351,67.818 ; C104.1 C103.2@17.269,67.815 ; C103.2 L100.2@20.825,67.815
  Top Layer w0.762: P100.2@14.605,58.547 C104.1
NetD100_2: D100.2 D101.2 P500.2 | length 15.2
  Top Layer w0.254: P500.2@27.686,101.6 P500.2@27.813,101.473 ; D100.2 27.813,92.964 D100.2@27.853,92.924
  Top Layer w2.54: D100.2@27.813,92.964 P500.2@27.813,101.473 ; D100.2@27.853,92.924 D101.2
NetD102_2: D102.2 R100.1 | length 3.4
  Top Layer w0.254: D102.2 R100.1@10.668,41.275
NetD103_2: D103.2 R101.1 | length 3.5
  Top Layer w0.254: D103.2@17.145,37.846 D103.2@17.272,37.973 ; D103.2 D103.2@17.272,37.973 ; R101.1@17.272,41.148 D103.2@17.272,37.973
NetD104_2: D104.2 R102.1 | length 3.4
  Top Layer w0.254: D104.2@23.368,37.732 D104.2 R102.1@23.368,41.148
NetP501_1: P501.1 U201.14 | length 47.4
  Bottom Layer w0.508: U201.14@74.803,99.822 74.803,98.552 76.454,96.901 100.076,96.901 104.14,92.837 118.237,92.837 P501.1
NetP501_2: P501.2 U201.16 | length 57.5
  Bottom Layer w0.254: 71.501,103.124 71.628,102.997
  Bottom Layer w0.508: U201.16@69.469,99.822 69.469,101.473 71.12,103.124 71.501,103.124 100.584,103.124 102.87,100.838 102.87,96.266 104.013,95.123 P501.2
NetP502_1: P502.1 U201.19 | length 65.3
  Bottom Layer w0.508: U201.19@62.103,99.949 62.103,94.996 62.992,94.107 98.171,94.107 106.807,85.471 P502.1
NetP502_2: P502.2 U201.17 | length 58.3
  Bottom Layer w0.508: U201.17 67.056,96.393 67.945,95.504 99.187,95.504 106.426,88.265 118.237,88.265 P502.2
NetP503_1: P503.1 U301.14 | length 59.3
  Bottom Layer w0.508: U301.14 74.676,62.738 75.438,61.976 99.568,61.976 101.219,63.627 101.219,76.454 102.87,78.105 P503.1
NetP503_2: P503.2 U301.16 | length 61.8
  Bottom Layer w0.508: U301.16@69.596,63.754 69.596,65.278 70.993,66.675 96.774,66.675 99.314,69.215 99.314,77.851 102.108,80.645 P503.2
NetP504_1: P504.1 U301.19 | length 68.7
  Bottom Layer w0.508: U301.19 61.976,60.071 62.611,59.436 101.727,59.436 104.902,62.611 104.902,68.707 106.934,70.739 P504.1
NetP504_2: P504.2 U301.17 | length 63.8
  Bottom Layer w0.254: U301.17@67.056,63.246 U301.17@67.691,63.881 ; U301.17 U301.17@67.056,63.754
  Bottom Layer w0.508: U301.17@67.056,63.246 67.056,61.722 68.072,60.706 100.584,60.706 103.124,63.246 103.124,70.485 105.918,73.279 P504.2
NetP505_1: P505.1 U401.14 | length 75.8
  Bottom Layer w0.254: U401.14 U401.14@74.676,29.591
  Bottom Layer w0.508: U401.14 74.676,27.686 75.438,26.924 99.695,26.924 109.474,36.703 109.474,61.722 111.252,63.5 P505.1
NetP505_2: P505.2 U401.16 | length 79.7
  Top Layer w0.254: U401.16@69.596,29.337 U401.16
  Bottom Layer w0.508: U401.16 69.596,31.242 70.739,32.385 103.251,32.385 107.95,37.084 107.95,61.849 112.141,66.04 P505.2
NetP506_1: P506.1 U401.19 | length 85.8
  Bottom Layer w0.508: U401.19 61.976,25.527 63.5,24.003 101.219,24.003 112.395,35.179 112.395,54.102 114.681,56.388 P506.1@118.745,56.388
NetP506_2: P506.2 U401.17 | length 79.4
  Bottom Layer w0.508: U401.17 67.056,26.543 68.199,25.4 100.457,25.4 110.998,35.941 110.998,54.356 115.443,58.801 P506.2
NetQ200_1: Q200.1 R201.2 | length 3.7
  Top Layer w0.254: Q200.1 104.127,96.634 R201.2@104.267,96.774
NetQ200_3: Q200.3 R200.1 U201.26 | length 37.8
  Top Layer w0.254: U201.26 72.136,91.44 74.93,94.234 R200.1@95.25,94.234 ; R200.1 99.69,94.229 Q200.3
NetQ201_1: Q201.1 R203.2 | length 4.1
  Top Layer w0.254: Q201.1@100.711,85.852 100.777,85.786 R203.2@104.775,85.786
NetQ201_3: Q201.3 R202.1 U201.22 | length 23
  Top Layer w0.254: U201.22 82.296,80.264 83.312,79.248 93.472,79.248 95.25,81.026 R202.1 ; R202.1@95.377,83.312 95.447,83.382 Q201.3
NetQ300_1: Q300.1 R301.2 | length 3.8
  Top Layer w0.254: Q300.1@99.314,57.785 99.319,57.78 R301.2
NetQ300_3: Q300.3 R300.1 U301.26 | length 33.1
  Top Layer w0.254: U301.26@72.136,46.482 72.136,47.117 73.406,48.387 90.297,48.387 91.948,50.038 91.948,54.483 92.832,55.367 R300.1 ; R300.1@93.783,55.442 Q300.3@98.425,55.442
NetQ301_1: Q301.1 R303.2 | length 3.6
  Top Layer w0.254: Q301.1@99.187,46.736 99.314,46.863 102.357,46.863 R303.2@102.616,46.604
NetQ301_3: Q301.3 R302.1 U301.22 | length 17.3
  Top Layer w0.254: U301.22 82.296,45.085 82.931,44.45 R302.1 ; R302.1@93.98,44.323 94.05,44.393 Q301.3
NetR103_1: R103.1 R104.2 U100.4 | length 8.4
  Top Layer w0.254: R103.1 R103.1@5.654,79.69
  Top Layer w0.508: R103.1@5.654,79.69 R104.2 ; R104.2@8.509,79.756 10.541,79.756 12.131,78.166 U100.4
nSleep: P507.17 R205.1 U201.211 U301.211 | length 122.9
  Top Layer w0.254: v1(56.261,73.152) R205.1 ; 56.578,61.151 58.61,61.151 59.436,60.325 U301.211 59.436,38.1 62.611,34.925 88.392,34.925 89.789,33.528 v1(89.789,21.717) v1@89.789,21.59 ; R205.1@59.311,73.281 59.436,73.406 U201.211
  Bottom Layer w0.254: v1(56.261,61.468) v1(56.261,73.152) ; v1(89.789,21.717) 101.092,21.717 103.886,24.511 P507.17 ; v1(56.261,73.152) 56.515,73.152 56.261,73.406 v1(56.261,73.152)
PWM(+)_Motor5: P507.9 U401.28 | length 66.9
  Top Layer w0.254: U401.28@67.056,12.065 67.056,17.907 68.58,19.431 91.059,19.431 92.329,20.701 92.329,27.686 99.314,34.671 P507.9
PWM(+)_Motor6: P507.13 U401.24 | length 52.8
  Top Layer w0.254: U401.24@77.343,12.065 77.343,15.494 78.486,16.637 92.583,16.637 95.377,19.431 95.377,25.908 99.06,29.591 P507.13
PWM(-)_Motor5: P507.11 U401.26 | length 59.9
  Top Layer w0.254: U401.26@72.009,12.065 72.009,16.637 73.406,18.034 91.821,18.034 93.853,20.066 93.853,26.67 99.314,32.131 P507.11
PWM(-)_Motor6: P507.15 U401.22 | length 46.3
  Top Layer w0.254: U401.22@82.296,12.192 82.296,14.351 83.185,15.24 93.472,15.24 96.901,18.669 96.901,25.654 98.298,27.051 P507.15
PWM_Motor1: P507.1 R201.1 U201.28 | length 108.3
  Top Layer w0.254: R201.1@104.267,94.869 104.394,94.742 108.712,94.742 110.49,92.964 v1(110.49,83.185) 110.49,44.831 P507.1
  Bottom Layer w0.254: U201.28@67.056,82.423 67.056,83.312 68.199,84.455 88.392,84.455 91.186,81.661 107.188,81.661 108.712,83.185 v1(110.49,83.185)
PWM_Motor2: P507.3 R203.1 U201.24 | length 87.3
  Top Layer w0.254: U201.24@77.216,82.423 U201.24 77.216,80.391 79.248,78.359 102.235,78.359 104.394,80.518 R203.1 107.188,83.82 108.712,82.296 108.712,42.799 109.22,42.291 P507.3
PWM_Motor3: P507.5 R301.1 U301.28 | length 72.5
  Top Layer w0.254: R301.1@103.251,55.753 104.648,55.753 105.791,54.61 v1(105.791,39.751) P507.5
  Bottom Layer w0.254: U301.28@67.056,46.101 67.056,42.799 70.104,39.751 v1(105.791,39.751)
PWM_Motor4: P507.7 R303.1 U301.24 | length 50
  Top Layer w0.254: U301.24@77.216,46.101 77.216,44.704 79.375,42.545 100.838,42.545 R303.1@102.616,44.323 ; R303.1 R303.1@102.616,44.323 ; P507.7 103.759,37.211 102.616,38.354 R303.1@102.616,44.323
pads on no net: SC500.0 SC501.0 SC502.0 SC503.0

## Polygon pours and split planes (outlines as drawn)
GND on Bottom Layer "Bottom Layer" (solid, remove dead copper, pour order 70): 0.5,109.5 0.5,0.5 129.5,0.5 129.5,109.5
5V on Bottom Layer "Bottom Layer" (solid, remove dead copper, pour order 54): 55.118,50.8 53.848,49.53 53.848,49.276 55.118,48.006
12V on Top Layer "Top Layer" (solid, remove dead copper, pour order 50): 53.866,92.407 53.866,82.12 48.024,87.962
GND on Top Layer "Top Layer" (solid, remove dead copper, pour order 66): 14.097,75.819 cw(c16.637,75.819) 16.637,78.359 27.051,78.359 cw(c26.131,77.439) 27.432,77.439 27.432,70.485 27.16,70.213 cw(c25.364,72.009) 25.364,69.469 12.319,69.469 12.301,69.487 cw(c14.097,71.283) 11.557,71.283 11.557,71.628 cw(c13.703,71.628) 12.186,73.146 14.097,75.057
GND on Top Layer "Top Layer" (solid, remove dead copper, pour order 68): 0.5,109.5 0.5,0.5 129.5,0.5 129.5,109.5

## Silkscreen, mask and mechanical layers (free items; w line width, h text height)
Top Overlay:
  text "LiPo-Batterie 11.1V" at 7.493,106.045 h2
  text "B+" at 33.782,100.584 h2
  text "B-" at 11.557,100.203 h2
  text "M 1" at 121.92,92.964 h2
  text "M 2" at 121.92,85.852 h2
  text "12V" at 33.02,81.915 h2
  text "M 3" at 121.92,78.486 h2
  text "M 4" at 121.92,71.12 h2
  text "M 5" at 121.793,63.881 h2
  text "5V" at 20.574,59.817 h2
  text "M 6" at 121.793,56.642 h2
  text "3.3V" at 20.066,52.451 h2
  text "12V" at 8.255,32.639 h2
  text "5V" at 15.621,32.512 h2
  text "3.3V" at 20.828,32.512 h2
  text "Anschluss MPC 555" at 124.587,14.351 h2 r90
  text "SysP 2018 / Team 10 Chur / Motorentreiber Version 1.1 / Michael Alig / 27.03.2018" at 11.811,6.223 h2
Mechanical 1:
  lines w0: 0,0 130.048,0 130.048,109.474 130.048,109.982 0,109.982 ; 0,0.254 0,109.982 ; 0,109.728 0,109.982

## Text inside footprints (layer, text, board x,y; h text height)
P507: Top Overlay "1" at 116.586,47.371 h1.27 r270; Top Overlay "2" at 119.126,47.371 h1.27 r270; Top Overlay "23" at 116.586,15.367 h1.27 r270; Top Overlay "24" at 119.126,15.367 h1.27 r270